# Altium PCB PCB_ds18b20.PcbDoc
Units mil, origin at the board's own origin, x right, y up, seen from the top; angles counter-clockwise.
Board outline 6000 x 4000 mil, 2 copper layers (Top Layer, Bottom Layer); 16 components, 21 nets, 98 pads, 0 vias.
Unrouted connection lines stored in the file: 4.
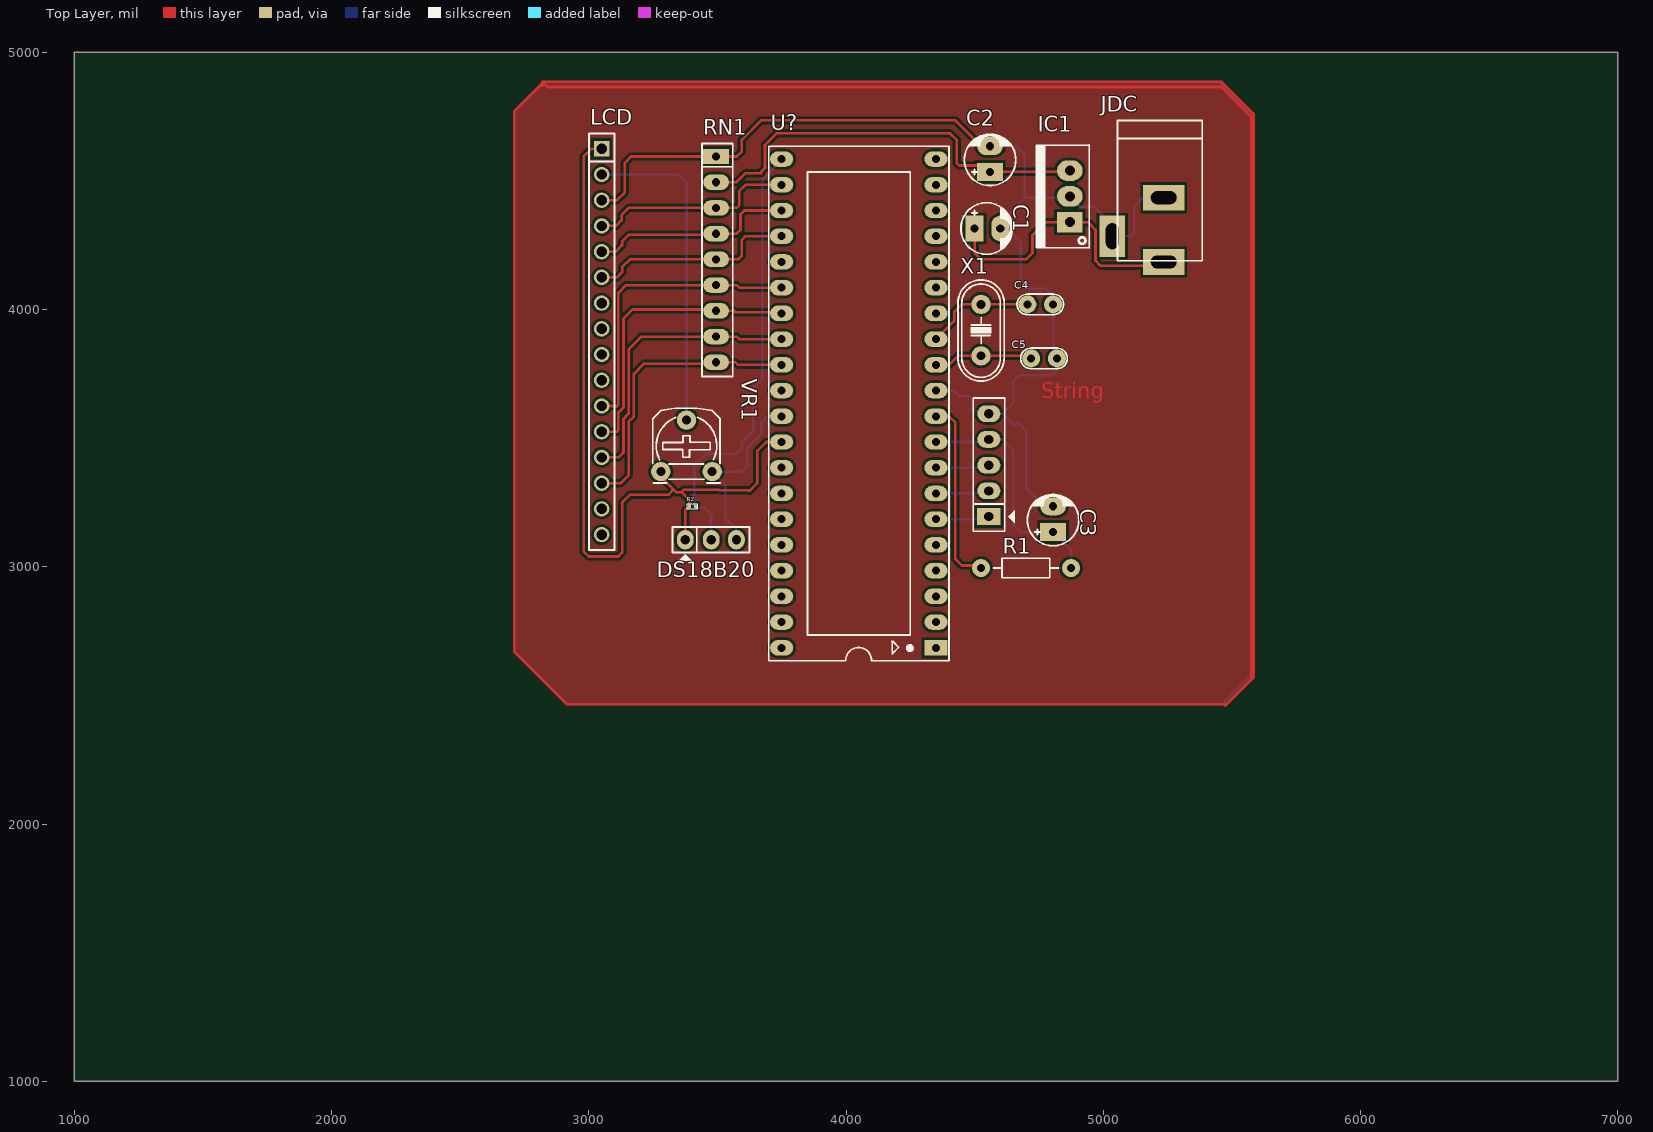
[diagram p0: Top Layer view]
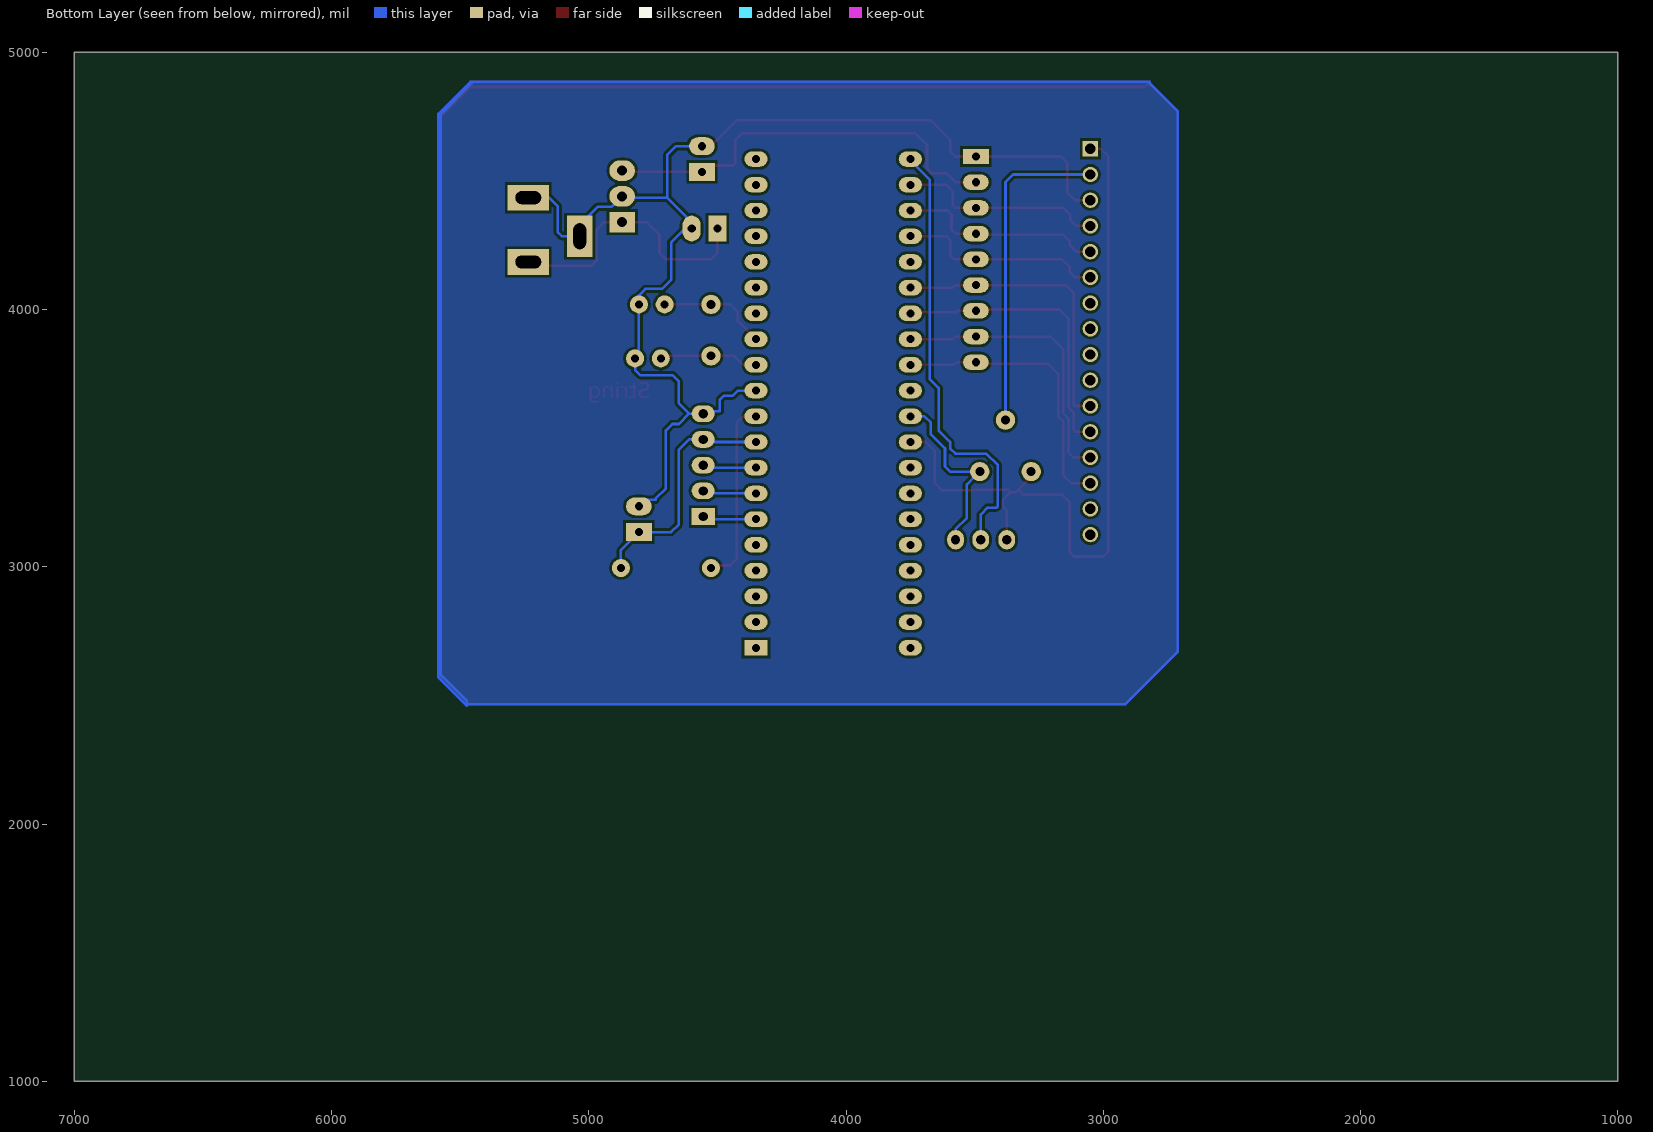
[diagram p1: Bottom Layer view, seen from below]
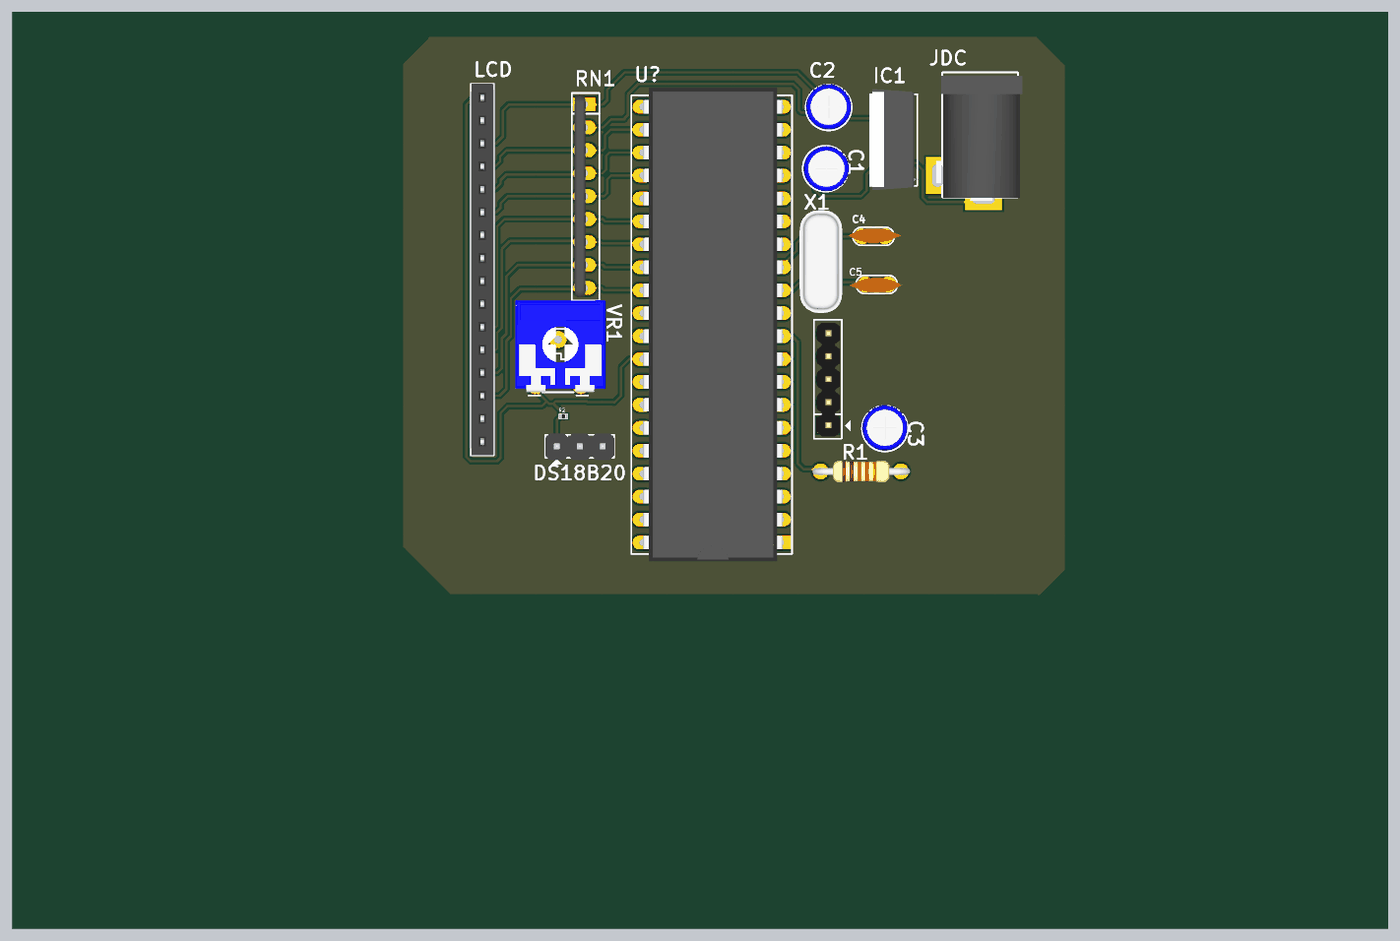
[diagram p2: 3D render of the assembled board from above, using the file's embedded part models]

## Layer stack, top to bottom
Top Solder: solder mask 0.4, Solder Resist, Dk 3.5
Top Layer: signal copper 1.4
Dielectric 1: dielectric 12.6, FR-4, Dk 4.8
Bottom Layer: signal copper 1.4
Bottom Solder: solder mask 0.4, Solder Resist, Dk 3.5

## Board outline
1000,1000 7000,1000 7000,5000 1000,5000

## Design rules (kind name [scope] priority, off if disabled: settings)
Clearance [All] p1: gap=10 ignorepadtopadclearanceinfootprint=FALSE except(0: Arc-Hole Track-Hole SMDPad-Hole THPad-Hole Via-Hole Fill-Hole Poly-Hole Region-Hole Text-Hole)
PolygonConnect [All] p1: connectstyle=Relief reliefconductorwidth=10 reliefentries=4 polygonreliefangle="90 Angle" airgapwidth=10
RoutingVias [All] p1: holewidth=28 width=50 viastyle="Through Hole" minholewidth=28 minwidth=50 maxholewidth=28 maxwidth=50
SolderMaskExpansion [All] p1: expansion=4
Width [All] p1: maxlimit=10 minlimit=10 preferedwidth=10
30 further rules are at their usual default settings.

## Components (designator, comment, footprint, x,y, rotation, side; value= is the part's Value field where it differs from the comment)
C1 "470uF" CP1/2 4500,4315 r0 top value=10uF/50V
C2 "1000uF" CP1/2 4560,4535 r90 top value=10uF/50V
C3 "10uF" CP1/2 4805,3135 r90 top value=10uF/50V
C4 "22p" CN1 4705,4020 r0 top value=100pF
C5 "22p" CN1 4820,3810 r180 top value=100pF
DS18B20 "ds18b20" JP3 3475,3105 r0 top value=J3 (schematic designator J1)
IC1 "LM7805" QTO-220 4870,4340 r90 top
JDC "Jac DC" DC-IN 5135,4310 r270 top
LCD "JP16" JP16-C1T 3050,4625 r270 top
R1 "10k" R1/4W 4875,2995 r180 top value="R1/4W - 1K"
R2 "4k7" RES-SMD-0201 3403.19,3235 r0 top
RN1 "1K" RN8 3495,4595 r270 top value="Tro thanh 10K" (schematic designator RN?)
U? "ATmega32A" DIP40/W0.6 4350,2685 r90 top
VR1 "10K" VR 3280,3370 r0 top value="VR 10K"
X1 "4Mhz" XT2 4525,3920 r90 top
? "JP5" JP5 4555,3195 r90 top

## Footprints (in the part's own frame and the unit in brackets; to place one, negate y for a bottom-side part, rotate by r counter-clockwise, add the part's x,y. Pads: shape width x height; smd on the part's side, far side on the other; paste and mask are expansions set on the pad)
CN1 [mil]
  round 70 hole 31: 1(0,0) 2(100,0)
  silkscreen extent -40,-40 141,40, body extent -60,-30 170,37, height 265
CP1/2 [mil] "Tu hoa < 22uF/16>50V"
  rect 70x100 hole 32: 1(0,0)
  oval 70x100 hole 32: 2(100,0)
  silkscreen extent -53,-100 147,100, body extent -49,-99 149,99, height 287
DC-IN [mil] "Jac DC input"
  rect 100x160 hole 50 slot 100 at 90 deg: 1(125,100) 2(-125,100)
  rect 160x100 hole 50 slot 100 at 0 deg: 3(25,-100)
  silkscreen extent -425,-80 120,250, body extent -410,-105 134,269, height 434
DIP40/W0.6 [mil] "40 PIN, W 600mil, Pin to pin 100mil"
  rect 60x90 hole 31: 1(0,0)
  oval 60x90 hole 31: 2(100,0) 3(200,0) 4(300,0) 5(400,0) 6(500,0) 7(600,0) 8(700,0) 9(800,0) 10(900,0) 11(1000,0) 12(1100,0) 13(1200,0) 14(1300,0) 15(1400,0) 16(1500,0) 17(1600,0) 18(1700,0) 19(1800,0) 20(1900,0) 21(1900,600) 22(1800,600) 23(1700,600) 24(1600,600) 25(1500,600) 26(1400,600) 27(1300,600) 28(1200,600) 29(1100,600) 30(1000,600) 31(900,600) 32(800,600) 33(700,600) 34(600,600) 35(500,600) 36(400,600) 37(300,600) 38(200,600) 39(100,600) 40(0,600)
  silkscreen extent -50,-50 1950,650, body extent -82,-10 1982,600, height 224
JP3 [mil] "Jumper 3"
  oval 65x75 hole 36: 1(-100,0) 2(1,0) 3(99,0)
  silkscreen extent -150,-81 150,50, body extent -150,-60 150,55, height 355
JP5 [mil] "JP5"
  rect 65x90 hole 36: 1(0,0)
  oval 65x90 hole 36: 2(100,0) 3(200,0) 4(300,0) 5(400,0)
  silkscreen extent -57,-101 461,60, body extent -48,-53 448,45, height 323
JP16-C1T [mm] "16 row, straight, gold plating"
  rect 1.52x1.52 hole 1.02: 1(0,0)
  round 1.52 hole 1.02: 2(2.54,0) 3(5.08,0) 4(7.62,0) 5(10.16,0) 6(12.7,0) 7(15.24,0) 8(17.78,0) 9(20.32,0) 10(22.86,0) 11(25.4,0) 12(27.94,0) 13(30.48,0) 14(33.02,0) 15(35.56,0) 16(38.1,0)
  silkscreen extent -1.52,-1.27 39.62,1.27, body extent -1.52,-1.25 39.62,1.25, height 8.51
QTO-220 [mil] "TO-220 - 1-2-3"
  rect 80x100 hole 39: 1(0,0)
  oval 80x100 hole 39: 2(100,0) 3(200,0)
  silkscreen extent -100,-76 300,130, body extent -119,-64 322,121, height 755
R1/4W [mil] "R 1/4W, 2 Pin, 350mil"
  round 70 hole 31: 1(0,0) 2(350,0)
  silkscreen extent 48,-38 302,38, body extent -40,-47 386,47, height 111
RES-SMD-0201 [mm]
  rect 0.3x0.4 smd: 1(-0.3,0) 2(0.3,0)
  silkscreen extent -0.51,-0.25 0.51,0.25, body extent -0.3,-0.15 0.3,0.15, height 0.22
RN8 [mil] "R SIP8, 9 Pin"
  rect 60x100 hole 32: 1(0,0)
  oval 60x100 hole 32: 2(100,0) 3(200,0) 4(300,0) 5(400,0) 6(500,0) 7(600,0) 8(700,0) 9(800,0)
  silkscreen extent -50,-55 855,65, body extent -43,-44 843,5, height 259
VR [mil] "Resistor Variable"
  round 75 hole 35: 1(0,0) 2(100,200) 3(200,0)
  silkscreen extent -31,-44 231,246, body extent -87,-30 307,372, height 165
XT2 [mil] "Footpin for Crystal 2 pin"
  round 75 hole 34: 1(-100,0) 2(100,0)
  silkscreen extent -198,-90 195,90, body extent -233,-93 213,90, height 138

## Part data
C1 C2 C3: library part CP1, "Cap P  0,1uF < 22uF , 16 - 50V", Description 1="10 => 220uF/6,3V/10V - 10uF => 100uF/16V", Description 2="0,1uF => 33uF/50V - 10uF => 22uF/63V", Description 3="0,47uF => 10uF/100V"
C4 C5: library part CN1, "Cap np  1pF - 472pF"
DS18B20: library part JP3, "Jumper 3"
IC1: library part LM78xx, "On ap +, from + 5 to + 24VDC", =LM7808
JDC: library part DCIN, "Jac DC input"
LCD: "WR-PHD 2.54 mm Angled Socket Header", Manufacturer="Würth Elektronik eiSos GmbH", partNo=613016143121, ComponentLink1 Description=Manufacturer, ComponentLink1URL=http://www.we-online.com, ComponentLink2 Description=Datasheet, ComponentLink2URL=http://katalog.we-online.de/em/datasheet/6130xx143121.pdf, Created by="Karrer Zheng", Created Date="29 March 2013", NoPins=16
R1: library part R1/4W, "Resistor 1/4W"
R2: library part Res-SMD, "Resistor", Manufacturer="Generic Components", Class=Passive, Published=08/06/2000, Publisher="Altium Hobart Technology Centre"
RN1: library part RN8, "Resistor 8 (Thanh)"
U?: library part ATmega32A-PU, "8-Bit AVR Microcontroller with 32K Bytes of In-System Programmable Flash Memory", Supplier Part Number 1=ATMEGA32-16PC-ND, Code_JEDEC=MS-011-AC, ComponentLink1Description=Datasheet, ComponentLink1URL=http://www.atmel.com/dyn/resources/prod_documents/doc2503.pdf, ComponentLink2Description="Atmel.com Home", ComponentLink2URL=http://www.atmel.com, DatasheetVersion=2503C-AVR-10/02, PackageDescription="40-lead (0.600\"/15.24mm Wide) Plastic Dual Inline Package (PDIP)", PackageReference=40P6, PackageVersion="revB, Sep-2001", Published=17-Sep-2003, Publisher="Altium Limited", Supplier 1=Digi-Key, Supplier 2=Mouser, Supplier Part Number 2=556-ATMEGA32-16PC
VR1: library part VR1, "Var Resistor"
X1: library part XT2, "Crystal For all Crystal 2pin."

## Nets (pads, with @x,y where several pads share a name; then routed paths per layer and width w, separated by ;. In a path a pad name is that pad's centre, name@x,y a point inside that pad or via, vN(x,y) a via of type N, cw(c..) or ccw(c..) an arc to the next point about the centre after c; other vN are vias at no path point)
5V: DS18B20.1 LCD.1 R1.2 R2.1 U?.10 U?.30 U?.32 VR1.1 | length 3834.8
  Top Layer w10: LCD.1 3010,4625 2980,4595 2980,3060 3000,3040 3115,3040 3130,3055 3130,3250 3160,3280 3310,3280 3330,3300 ; VR1.1@3295,3385 VR1.1 3270,3360 3330,3300 ; DS18B20.1 3375,3218.62 R2.1 3391.38,3258.62 3360,3290 ; U?.32 3690,3485 3655,3450 3655,3325 3625,3295 3622.5,3297.5 3508.25,3297.5 3505.75,3300 3370,3300 3360,3290 ; U?.10 4400,3585 4425,3560 4425,3030 4450,3005 4515,3005 R1.2 ; 3330,3300 3340,3290 3360,3290
A: LCD.15
D4: LCD.11 RN1.6 U?.26 | length 1153.6
  Top Layer w10: LCD.11 3110,3625 3115,3630 3115,4065 3145,4095 RN1.6 3575,4095 3585,4085 U?.26
D5: LCD.12 RN1.7 U?.27 | length 1146.1
  Top Layer w10: LCD.12 3110,3525 3115,3530 3115,3600 3135,3620 3135,3965 3170,4000 RN1.7@3490,4000 ; RN1.7 3565,3995 3570,3990 U?.27@3745,3990
  Bottom Layer w10: RN1.7@3490,4000 RN1.7 ; U?.27@3745,3990 U?.27
D6: LCD.13 RN1.8 U?.28 | length 1121.4
  Top Layer w10: LCD.13 3115,3425 3135,3445 3135,3575 3155,3595 3155,3845 3205,3895 RN1.8 3575,3895 3585,3885 U?.28
D7: LCD.14 RN1.9 U?.29 | length 1118.5
  Top Layer w10: LCD.14 3125,3325 3155,3355 3155,3565 3175,3585 3175,3750 3215,3790 RN1.9@3490,3790 ; RN1.9 3570,3795 3580,3785 U?.29
  Bottom Layer w10: RN1.9@3490,3790 RN1.9
DS18B20: DS18B20.2 R2.2 U?.21 | length 1739
  Top Layer w10: U?.21@3750,4580 U?.21
  Bottom Layer w10: DS18B20.2 3476,3204 3450,3230 3415,3230 3410,3235 3410,3395 3455,3440 3575,3440 3595,3460 3595,3485 3640,3530 3640,3690 3640,3695 3675,3730 3675,4505 U?.21@3750,4580
EN: LCD.6 RN1.5 U?.24 | length 813.1
  Top Layer w10: LCD.6 3110,4125 3130,4145 3130,4165 3160,4195 RN1.5 3580,4195 3595,4210 3595,4270 3610,4285 U?.24
GND: ?.5 C1.2 C2.2 C3.2 C4.2 C5.1 DS18B20.3 IC1.2 JDC.2 JDC.3 LCD.3 RN1.1 U?.11 U?.31 VR1.3 | length 5525.6
  Top Layer w10: LCD.3 3110,4425 3140,4455 3140,4570 3165,4595 RN1.1 3575,4595 3595,4615 3595,4660 3670,4735 4425,4735 C2.2@4540,4620
  Bottom Layer w10: VR1.3 3595,3370 3615,3390 3615,3460 3670,3515 3670,3560 3695,3585 U?.31 ; VR1.3@3500,3360 3500,3350 3530,3320 3530,3190 3574,3146 DS18B20.3 ; U?.11 4420,3685 4440,3665 4475,3665 4490,3650 4490,3605 4545,3605 ?.5 4610,3595 ; C2.2 4660,4635 4695,4600 4695,4435 ; C3.2 4780,3260 4740,3260 4740,3265 4700,3305 4700,3530 4675,3555 4650,3555 4610,3595 ; JDC.2 5155,4435 5120,4400 5120,4300 5105,4285 JDC.3 5035,4330 4965,4400 4910,4400 IC1.2 4865,4435 4695,4435 ; 4610,3595 4650,3635 4650,3720 4675,3745 4800,3745 4820,3765 C5.1 4805,3825 C4.2 4805,4055 4780,4080 4715,4080 4680,4115 4680,4260 4625,4315 C1.2 4600,4340 4695,4435
K: LCD.16
MISO: ?.2 U?.7 | length 209.1
  Bottom Layer w10: U?.7 4545,3285 ?.2
MOSI: ?.1 U?.6 | length 209.1
  Bottom Layer w10: U?.6 4545,3185 ?.1
NetC1_1: C1.1 IC1.1 JDC.1 | length 1088.3
  Top Layer w10: C1.1 4500,4220 4525,4195 4700,4195 4725,4220 4725,4290 4775,4340 IC1.1 4940,4340 4970,4310 4970,4190 4990,4170 5220,4170 JDC.1
Reset: ?.4 C3.1 R1.1 U?.9 | length 947.1
  Bottom Layer w10: U?.9 4545,3485 ?.4 4610,3495 4650,3455 4650,3165 4680,3135 C3.1 4875,3065 R1.1
RS: LCD.4 RN1.3 U?.22 | length 810.2
  Top Layer w10: LCD.4 3105,4325 3127.5,4347.5 3127.5,4367.5 3155,4395 RN1.3 3575,4395 3585,4405 3585,4460 3610,4485 U?.22
RW: LCD.5 RN1.4 U?.23 | length 810.2
  Top Layer w10: LCD.5 3105,4225 3130,4250 3130,4265 3155,4290 RN1.4@3490,4290 ; RN1.4 3575,4295 3590,4310 3590,4370 3605,4385 U?.23
  Bottom Layer w10: RN1.4@3490,4290 RN1.4
SCK: ?.3 U?.8 | length 209.1
  Bottom Layer w10: U?.8 4545,3385 ?.3
VCC: C2.1 IC1.3 RN1.2 | length 1626.3
  Top Layer w10: RN1.2 3575,4495 3610,4530 3670,4530 3670,4535 3685,4550 3685,4640 3730,4685 4405,4685 4430,4660 4430,4570 4440,4560 4535,4560 C2.1 4865,4535 IC1.3
VSS: LCD.2 VR1.2 | length 1251.6
  Bottom Layer w10: LCD.2 3350,4525 3380,4495 3380,3600 VR1.2@3390,3590
X1: C4.1 U?.13 X1.2 | length 431.4
  Top Layer w10: U?.13 4420,3955 4420,3990 4450,4020 X1.2 C4.1
X2: C5.2 U?.12 X1.1 | length 388.6
  Top Layer w10: U?.12 4400,3785 4435,3820 X1.1 4710,3820 C5.2
pads on no net: LCD.7 LCD.8 LCD.9 LCD.10 U?.1 U?.2 U?.3 U?.4 U?.5 U?.14 U?.15 U?.16 U?.17 U?.18 U?.19 U?.20 U?.25 U?.33 U?.34 U?.35 U?.36 U?.37 U?.38 U?.39 U?.40
copper on no net: | length 33154.4
  Top Layer w10: 2820,4870 2825,4875 2825,4880 2840,4865 5460,4865 5575,4750 5575,2570 ; 2710,2670 2710,4770 ; 2710,2670 2915,2465 ; 2710,2670 2710,4770 ; 2710,2670 2915,2465 ; 2710,4770 2820,4880 ; 2710,4770 2820,4880 ; 2820,4880 2820,4885 5460,4885 5585,4760 5585,2570 5475,2460 ; 2915,2465 5470,2465 ; 2915,2465 5470,2465 ; 5470,2465 5475,2460 ; 5470,2465 5475,2460
  Bottom Layer w10: 5455,4880 5575,4760 5575,2580 5475,2480 5475,2470 ; 2710,2670 2710,4770 2820,4880 2820,4885 5460,4885 5585,4760 5585,2570 5475,2460 5470,2465 2915,2465 2710,2670

## Polygon pours and split planes (outlines as drawn)
no net on Top Layer "Top Layer-No Net" (solid, pour order 2): 2820,4885 5460,4885 5585,4760 5585,2570 5475,2460 5470,2465 2915,2465 2710,2670 2710,4770 2820,4880
no net on Bottom Layer "Bottom Layer-No Net" (solid, pour order 4): 2710,4770 2820,4880 2820,4885 5460,4885 5585,4760 5585,2570 5475,2460 5470,2465 2915,2465 2710,2670

## Other copper
Top Layer:
  text "String" at 4760,3655 h60